# Altium PCB KNX_POE.PcbDoc
Units mm, origin at the board's own origin, x right, y up, seen from the top; angles counter-clockwise.
Board outline 41.5 x 56.2 mm, 2 copper layers (Top Layer, Bottom Layer); 11 components, 6 nets, 25 pads, 47 vias.
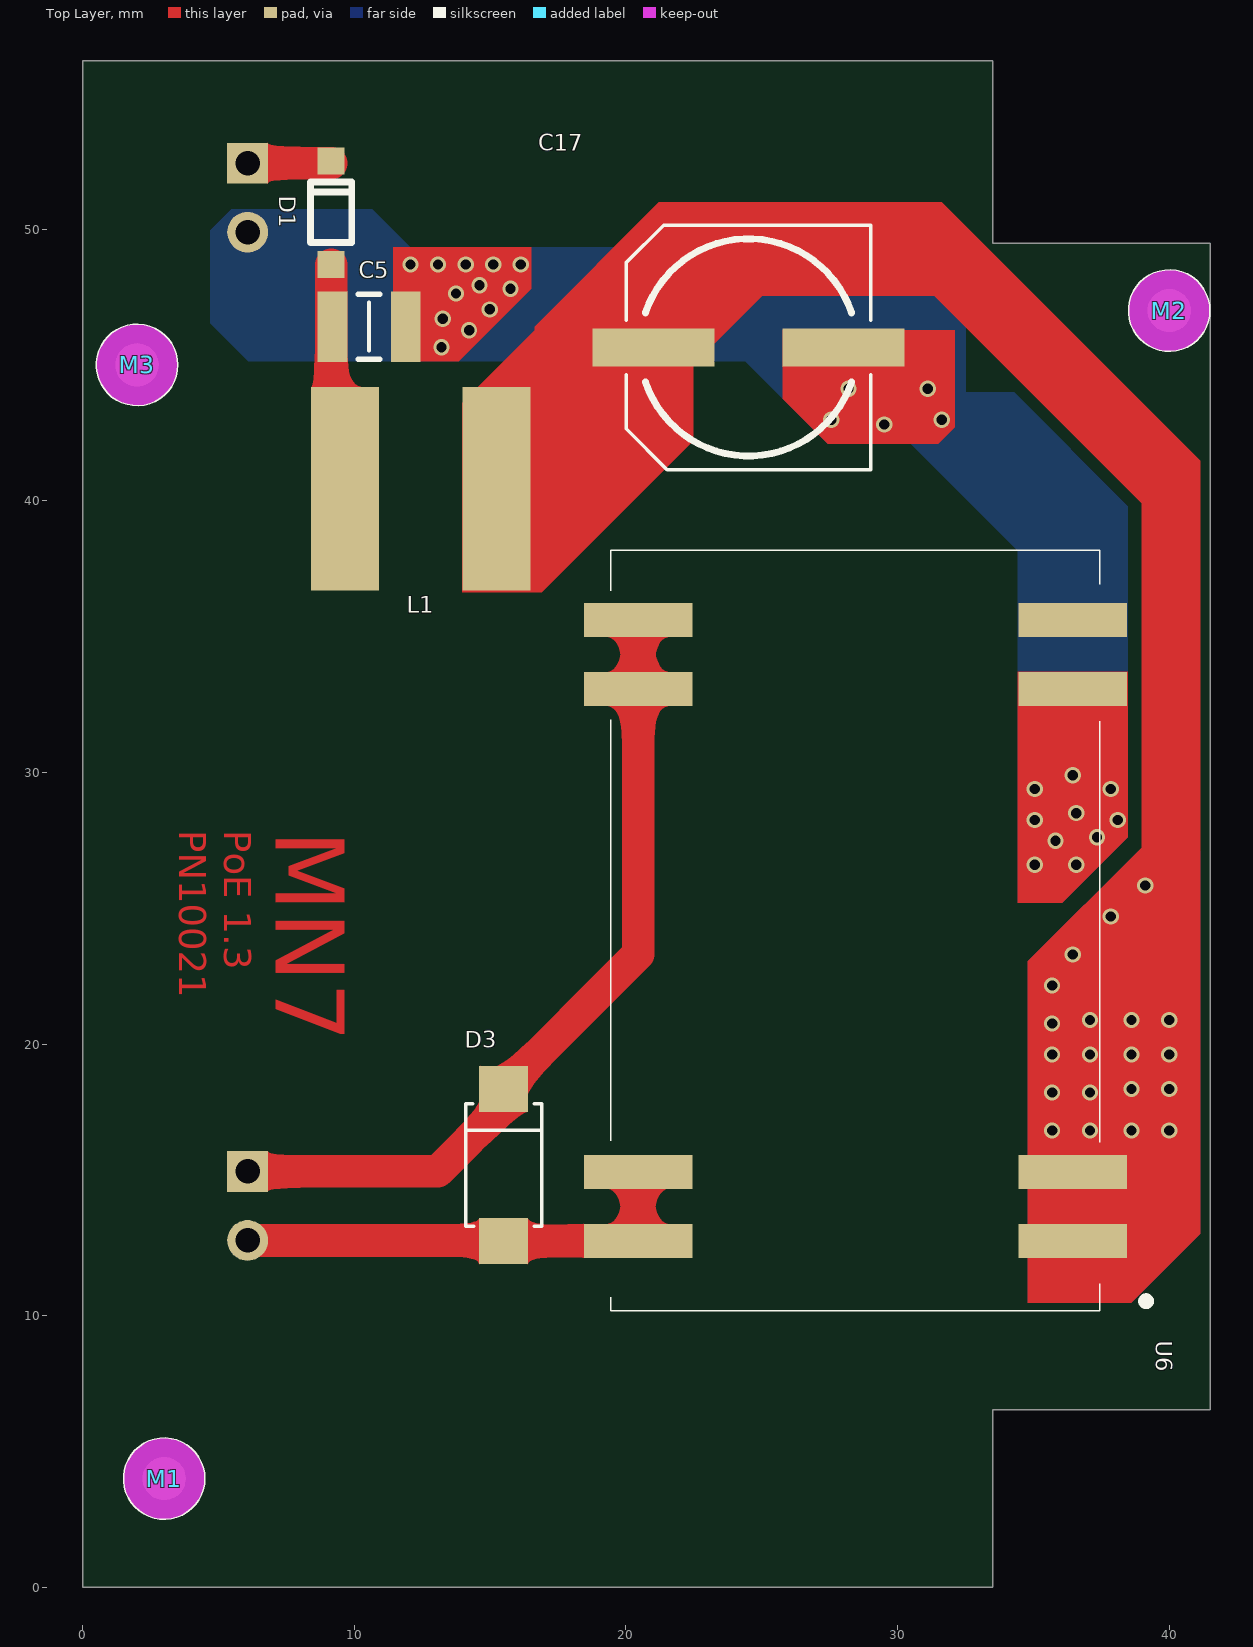
[diagram p0: Top Layer view]
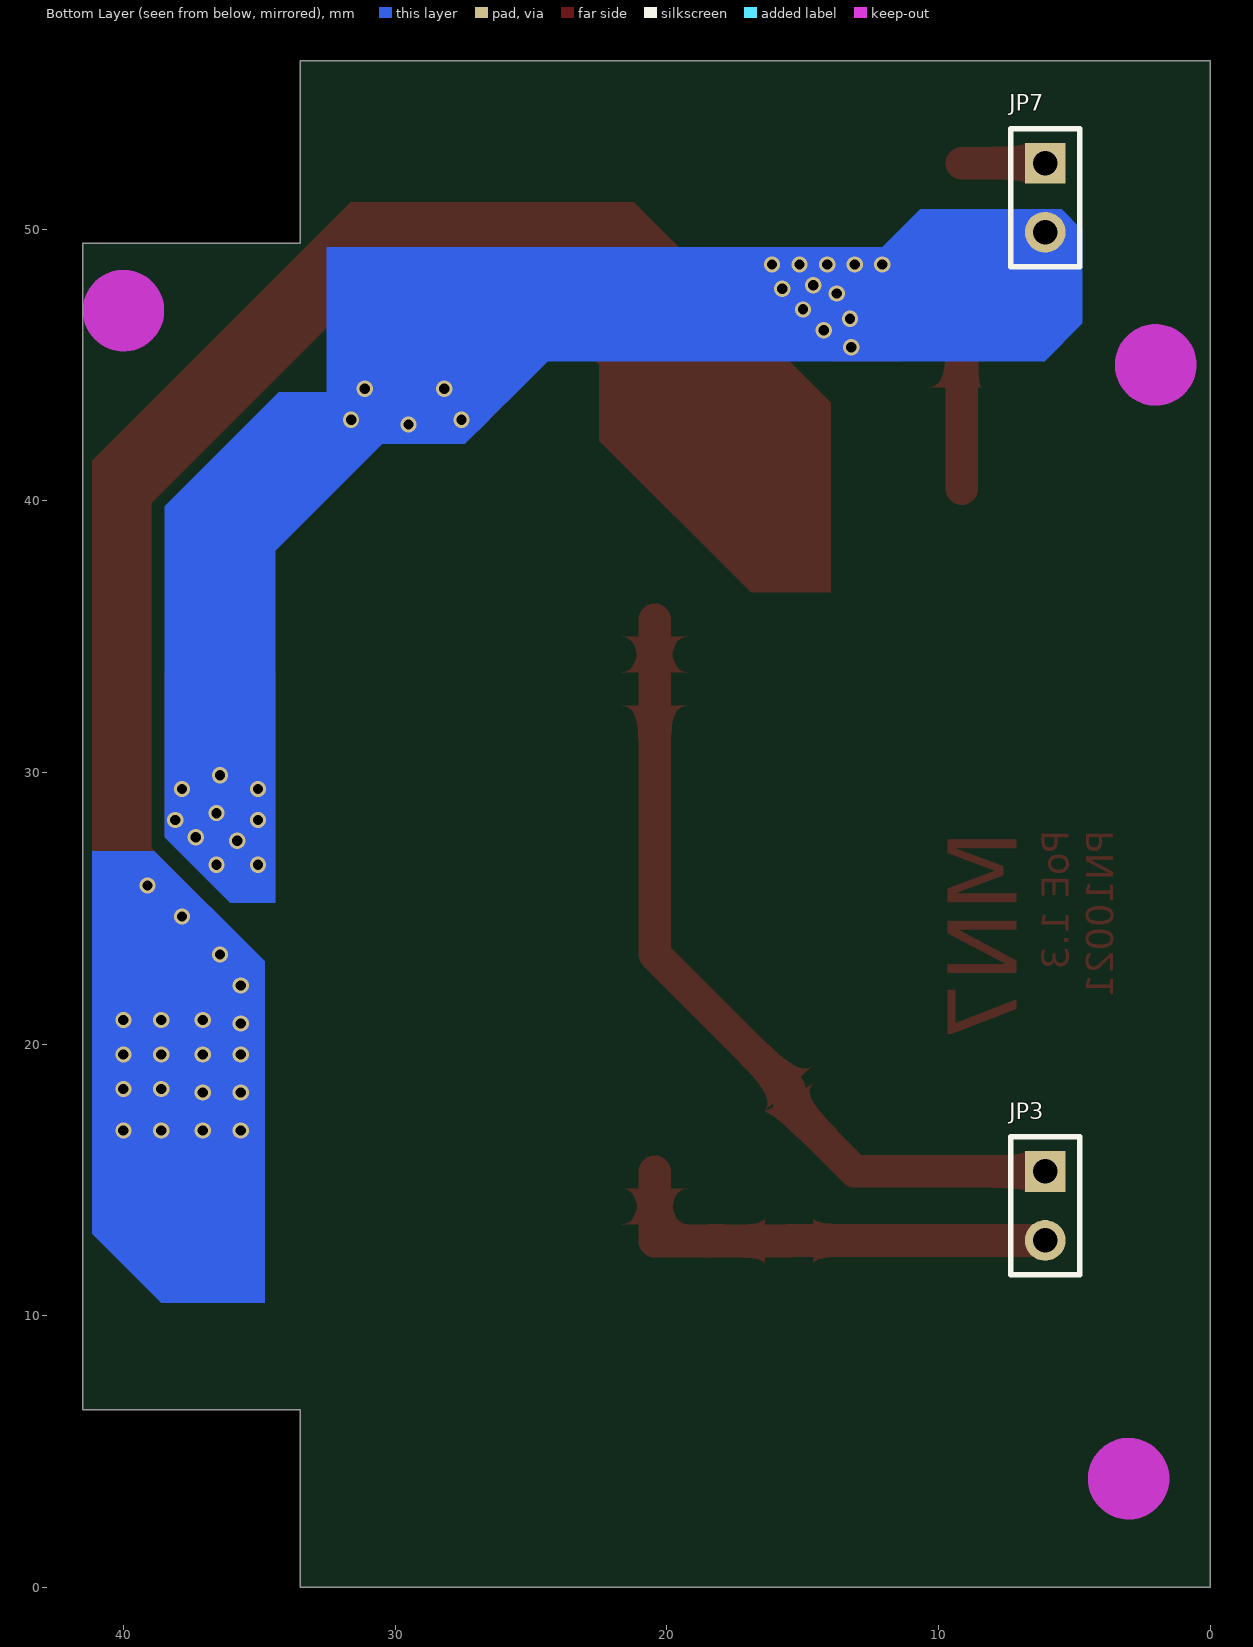
[diagram p1: Bottom Layer view, seen from below]

## Layer stack, top to bottom
Top Solder: solder mask 0.0102, Solder Resist, Dk 3.5
Top Layer: signal copper 0.0356
Dielectric 1: dielectric 0.32, FR-4, Dk 4.8
Bottom Layer: signal copper 0.0356
Bottom Solder: solder mask 0.0102, Solder Resist, Dk 3.5

## Board outline
0,0 0,56.2 33.503,56.2 33.503,49.48 41.504,49.48 41.504,6.538 33.503,6.538 33.503,0

## Design rules (kind name [scope] priority, off if disabled: settings)
Clearance [All] p1: gap=0.254
ComponentClearance [All] p1: gap=0 collisioncheckmode=3 verticalgap=0 showdistances=TRUE
MinimumSolderMaskSliver [All] p1: minsoldermaskwidth=0.1
PolygonConnect [All] p1: connectstyle=Relief reliefconductorwidth=0.254 reliefentries=4 polygonreliefangle="90 Angle" airgapwidth=0.254
RoomDefinition KNX_POE [InComponentClass('KNX_POE')] p1: confinementstyle=ConfineIn formatcopy=TRUE lockcomponents=FALSE outline -4.318,-1.089 42.164,-1.089 42.164,57.204 -4.318,57.204
RoutingVias [All] p1: holewidth=0.711 width=1.27 viastyle="Through Hole" minholewidth=0.3 minwidth=0.4 maxholewidth=0.711 maxwidth=1.27
SilkToBoardRegionClearance [(HasFootprint('Mark-3mm') AND IsEmbeddedBoard)] p1:
SilkToSolderMaskClearance [IsPad] p1: minsilkscreentomaskgap=0.04 clearancetoexposedcopper=TRUE
SolderMaskExpansion [All] p1: expansion=0.102
UnpouredPolygon [All] p1: allowunpoured=FALSE
Width [All] p1: maxlimit=2 minlimit=0.254 preferedwidth=0.85
25 further rules are at their usual default settings.

## Components (designator, comment, footprint, x,y, rotation, side; value= is the part's Value field where it differs from the comment)
C5 "10uF50V_1210" C1210 10.541,46.409 r0 top
C17 "470uF25V_POL_FT" Panasonic-FT-F_Case 24.511,45.647 r180 top
D1 "RB160M-30TR" SOD123 9.144,50.6 r90 top
D3 "SMAJ58A-E3/61" DO214A 15.494,15.548 r90 top
JP3 "Plug_2_90_2.54" HDR1X2-down 6.071,14.039 r270 bottom
JP7 "Plug_2_90_2.54" HDR1X2-down 6.071,51.159 r270 bottom
L1 "10uH2A" WE-PD2_1 12.446,40.44 r180 top
M1 "Mark" Mark-3mm 3,4 r0 top
M2 "Mark" Mark-3mm 40,47 r0 top
M3 "Mark" Mark-3mm 2,45 r0 top
U6 "AG-9812M" Ag9812M 28.448,24.184 r90 top

## Footprints (in the part's own frame and the unit in brackets; to place one, negate y for a bottom-side part, rotate by r counter-clockwise, add the part's x,y. Pads: shape width x height; smd on the part's side, far side on the other; paste and mask are expansions set on the pad)
Ag9812M [mm] "Silvertel, Ag9812M"
  rect 1.25x4 smd: 1(-11.43,-8) 1(-8.89,-8) 2(8.89,-8) 3(11.43,-8) 4(8.89,8) 4(11.43,8) 5(-11.43,8) 5(-8.89,8)
  silkscreen extent -14,-10.84 14,9, body extent -14,-9 14,9, height 12
C1210 [mm] "Chip Capacitor, Body 3.2x2.5mm, IPC High Density"
  rect 1.1x2.6 smd: 1(-1.35,0) 2(1.35,0)
  silkscreen extent -0.4,-1.2 0.4,1.2, body extent -1.6,-1.25 1.6,1.25, height 1.35
DO214A [mm] "Diode; 2 Leads"
  rect 1.7x1.8 smd: 1(2.8,0) 2(-2.8,0)
  silkscreen extent -2.25,-1.4 2.25,1.4, body extent -2.25,-1.4 2.25,1.4, height 2.3
HDR1X2-down [mm] "Connector; Header; 2 Position"
  rect 1.5x1.5 hole 0.9: 1(-1.27,0)
  round 1.5 hole 0.9: 2(1.27,0)
  silkscreen extent -2.54,-1.27 2.54,1.27, body extent -2.55,-0.33 2.53,10.03, height 2.57
Mark-3mm [mm]
  round 1.6 smd paste-2: 0(0,0)
  Keep-Out Layer circle w2: c0,0 r0.5
  silkscreen extent -1.5,-1.5 1.5,1.5
Panasonic-FT-F_Case [mm] "SMD electrolytic, Panasonic"
  rect 4.5x1.4 smd: 1(3.5,0) 2(-3.5,0)
  silkscreen extent -4.5,-4.5 4.5,4.5, body extent -4.5,-4.5 4.5,4.5, height 10.4
SOD123 [mm]
  rect 1x1 smd: 1(1.905,0) 2(-1.905,0)
  silkscreen extent -1.1,-0.76 1.14,0.76, body extent -1.4,-0.85 1.4,0.88, height 1.4
WE-PD2_1 [mm]
  rect 2.5x7.5 smd: 1(-2.794,0) 2(2.794,0)
  body extent -3.82,-3.5 3.81,3.5, height 5

## Part data
C5: "AVX,  X7R, 10%, 50V"
C17: "Panasonic, FT series"
D1: "Diode Schottky,2A,40V"
D3: "TVS, 400W, 58V"
JP3 JP7: "Plug, 2-Pin"
L1: library part 10uH2A_WE-PD2, "WE-PD2, 10uH2A"
U6: "PoE, 12V"

## Via types
v1: diameter 0.6, hole 0.381, Top Layer to Bottom Layer, 47 vias

## Nets (pads, with @x,y where several pads share a name; then routed paths per layer and width w, separated by ;. In a path a pad name is that pad's centre, name@x,y a point inside that pad or via, vN(x,y) a via of type N, cw(c..) or ccw(c..) an arc to the next point about the centre after c; other vN are vias at no path point)
GND: C5.2 C17.2 JP7.2 U6.2 | length 6
  Top Layer w0.85: v1(29.511,42.806) C17.2@29.511,45.647 ; v1(36.448,29.9) U6.2
  other v1: 35.052,26.597 36.576,26.597 35.814,27.486 37.338,27.613 35.052,28.248 38.1,28.248 36.576,28.502 35.052,29.391 37.846,29.391 27.559,42.98 31.623,42.98 28.194,44.123 31.115,44.123 13.208,45.647 14.224,46.282 13.259,46.701 14.986,47.044 13.741,47.628 15.748,47.806 14.605,47.933 12.065,48.695 13.081,48.695 14.097,48.695 15.113,48.695 16.129,48.695
NetC5_1: C5.1 D1.2 L1.2 | length 8.3
  Top Layer w0.85: C5.1@9.144,46.456 C5.1
  Top Layer w1.2: L1.2@9.144,40.44 C5.1@9.144,46.409 ; C5.1@9.144,46.456 D1.2
NetC17_1: C17.1 L1.1 U6.1 | length 61
  Top Layer w0.85: C17.1@18.923,45.647 19.511,45.647 22.305,48.441 33.02,48.441 40.132,41.329 40.132,18.978 36.448,15.294 U6.1@36.448,12.754
  Top Layer w1: L1.1@14.986,41.71 C17.1@18.923,45.647
  other v1: 35.687,16.818 37.084,16.818 38.608,16.818 40.005,16.818 35.687,18.215 37.084,18.215 38.608,18.342 40.005,18.342 35.687,19.612 37.084,19.612 38.608,19.612 40.005,19.612 35.687,20.755 37.084,20.882 38.608,20.882 40.005,20.882 35.687,22.152 36.449,23.295 37.846,24.692 39.116,25.835
NetD1_1: D1.1 JP7.1 | length 3.1
  Top Layer w1.2: JP7.1 D1.1@9.144,52.429
NetD3_1: D3.1 JP3.1 U6.4 | length 30.4
  Top Layer w0.85: D3.1@15.494,17.732 D3.1
  Top Layer w1.2: JP3.1 13.071,15.309 D3.1@15.494,17.732 ; D3.1 20.448,23.302 20.448,33.074 U6.4@20.448,35.614
NetD3_2: D3.2 JP3.2 U6.5 | length 17
  Top Layer w0.85: U6.5@20.442,15.288 U6.5@20.448,15.294
  Top Layer w1.2: JP3.2@6.071,12.767 15.513,12.767 D3.2 20.442,12.748 U6.5@20.442,15.288
pads on no net: M1.0 M2.0 M3.0 U6.3

## Other copper
Top Layer:
  region net GND: 25.768,46.282 25.768,43.755 27.432,42.091 31.496,42.091 32.106,42.701 32.106,46.282
  region net NetC17_1: 16.637,45.139 16.764,45.012 22.479,45.012 25.019,47.552 31.34,47.552 38.989,39.903 38.989,27.232 34.798,23.041 34.798,10.468 38.608,10.468 41.148,13.008 41.148,41.466 31.633,50.981 21.209,50.981 16.637,46.409
  region net GND: 34.417,33.709 34.417,25.2 36.068,25.2 38.481,27.613 38.481,33.709
  region net NetC17_1: 16.637,46.282 13.97,43.615 13.97,36.63 16.891,36.63 22.479,42.218 22.479,45.012
  region net GND: 11.43,45.139 13.843,45.139 16.51,47.806 16.51,49.33 11.43,49.33
  text "PN10021" at 3.556,27.867 h1 r270
  text "PoE 1.3" at 5.207,27.867 h1 r270
  text "MN7" at 7.112,27.867 h2.54 r270
Bottom Layer:
  region net NetC17_1: 34.798,10.468 38.608,10.468 41.148,13.008 41.148,27.105 38.862,27.105 34.798,23.041
  region net GND: 26.543,42.98 29.591,42.98 34.417,38.154 34.417,25.2 36.068,25.2 38.481,27.613 38.481,39.805 34.29,43.996 32.258,43.996
  region net GND: 26.543,46.282 26.543,42.98 27.432,42.091 31.496,42.091 32.512,43.107 32.512,46.282
  region net GND: 11.43,49.33 11.43,45.266 11.303,45.139 24.384,45.139 27.432,42.091 32.512,42.091 32.512,49.33
  region net GND: 12.065,49.33 10.668,50.727 5.461,50.727 4.699,49.965 4.699,46.536 6.096,45.139 12.065,45.139

## Silkscreen, mask and mechanical layers (free items; w line width, h text height)
Top Solder:
  text "PN10021" at 3.543,27.867 h1 r270
  text "PoE 1.3" at 5.194,27.867 h1 r270
  text "MN7" at 7.112,27.867 h2.54 r270
Outline:
  the board outline again, w0.254

## Dimensions
0,56.2 to 0,0 on Mechanical 16
33.503,56.2 to 41.504,49.48 on Mechanical 16
33.503,-0.2 to 41.504,6.538 on Mechanical 16
33.503,-0.18 to 41.504,6.538 on Mechanical 16
41.504,6.538 to 41.504,49.48 on Mechanical 16
0,0 to 33.503,0 on Mechanical 16